# EAGLE board ptn2 (EAGLE 5.06)
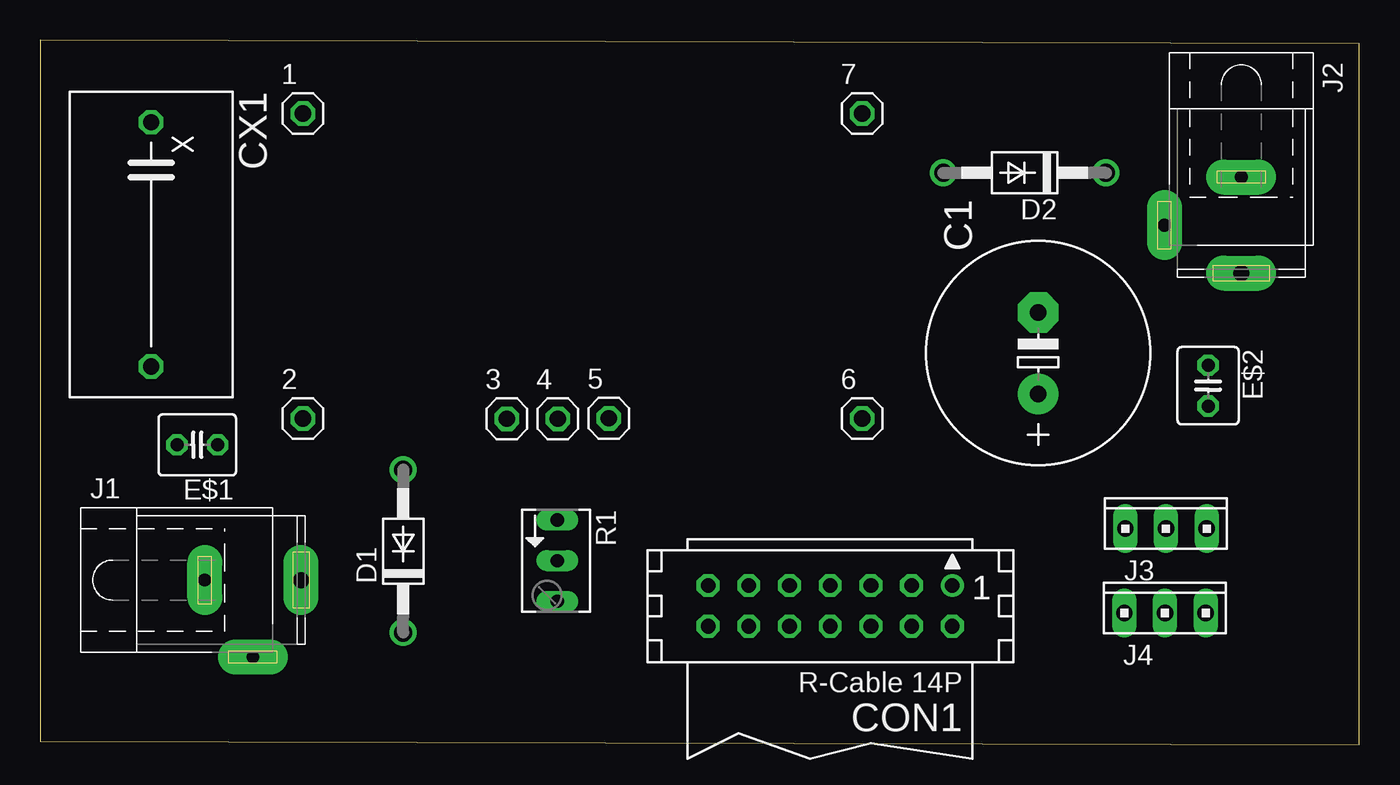
[diagram p0: board, top side]
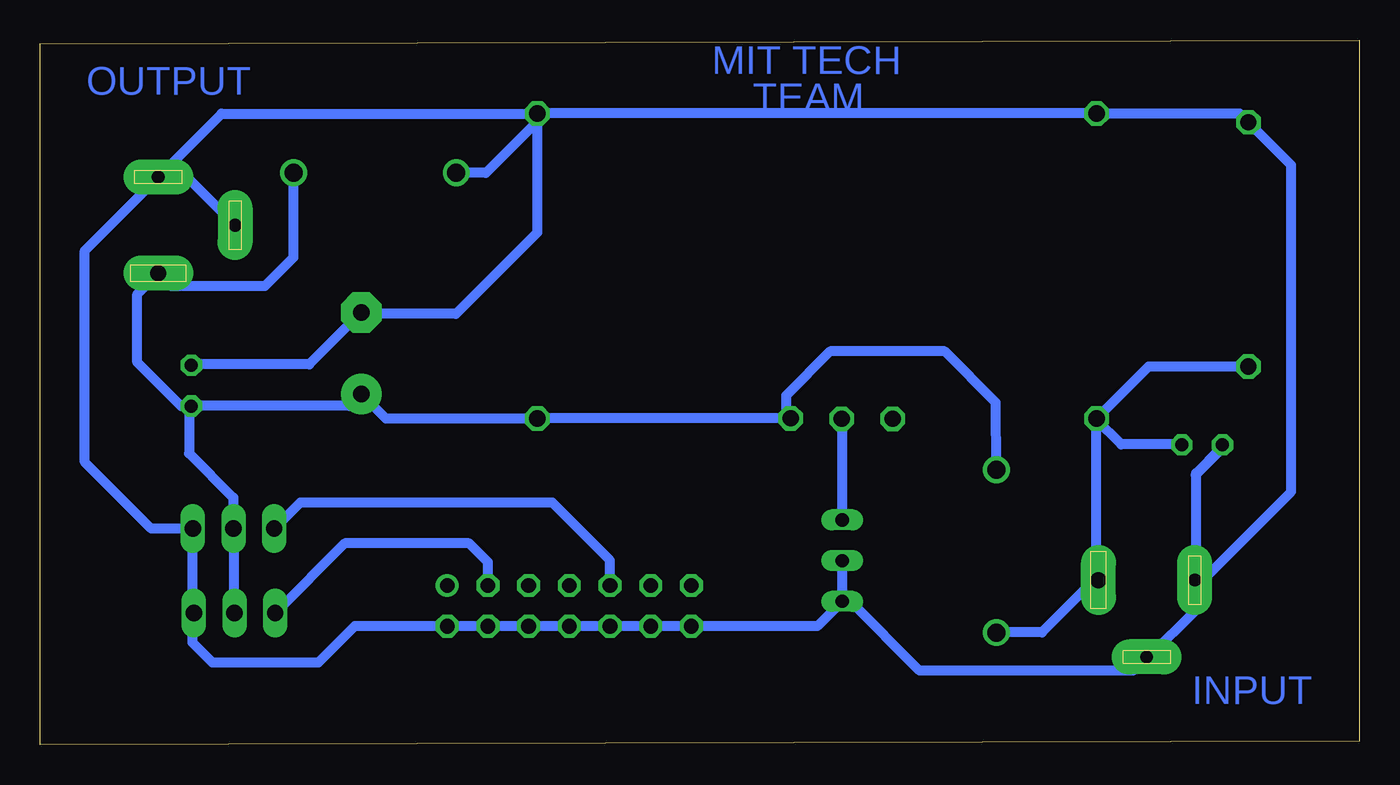
[diagram p1: board, bottom side, seen from below]

Size 82.34 x 43.97 mm. Coordinates in mm from the lower left corner, seen from the top.
Outline: 0,0.22 82.34,0 82.34,43.75 0,43.97 0,0.22
Copper layers (1*16): Top 0.035mm / dielectric 1.5mm / Bottom 0.035mm
Design rules "default": minimum track width 10mil, minimum drill 24mil, track to track 8mil, track to pad 8mil, pad to pad 8mil, via to via 8mil, smd to smd 8mil, copper to edge 40mil, drill to drill 8mil, minimum pad ring 10mil, minimum via ring 8mil, stop-mask expansion 4mil, vias tented up to drill 0mil, thermal gap 10mil

## Footprints (pad centres in the part's own frame; a part is rotated, then mirrored left to right if it is on the bottom)
1X01 = drill 1.016 octagon: 1 0,0
E5-13 = drill 1.016 pad 2.54 round: + -2.54,0 | drill 1.016 pad 2.54 octagon: - 2.54,0
CON14 = drill 0.914 round: 1 -7.62,-1.27 | drill 0.914 octagon: 2 -7.62,1.27; 3 -5.08,-1.27; 4 -5.08,1.27; 5 -2.54,-1.27; 6 -2.54,1.27; 7 0,-1.27; 8 0,1.27; 9 2.54,-1.27; 10 2.54,1.27; 11 5.08,-1.27; 12 5.08,1.27; 13 7.62,-1.27; 14 7.62,1.27
XC15B10 = drill 1.016 octagon: 1 -7.62,0; 2 7.62,0
DO41-10 = drill 1.118 round: A 5.08,0; C -5.08,0
C025-040X050 = drill 0.813 octagon: 1 -1.27,0; 2 1.27,0
SPC4078 = drill 0.8 pad 2.184 long: 1 -3,0; 2 0,-4.8 | drill 1 pad 2.184 long: 3 3,0
10X03MTA = drill 1.016 long: 1 2.54,0; 2 0,0; 3 -2.54,0
B64Y = drill 0.813 long: A 2.54,0; E -2.54,0; S 0,0

## Placement (x,y rotation side)
1  [1X01]  16.41,39.38 0 top
2  [1X01]  16.41,20.35 0 top
3  [1X01]  29.13,20.34 0 top
4  [1X01]  32.32,20.34 0 top
5  [1X01]  35.5,20.37 0 top
6  [1X01]  51.31,20.35 0 top
7  [1X01]  51.31,39.38 0 top
C1  [E5-13]  62.3,24.44 90 top
CON1  [CON14]  49.31,8.67 180 top
CX1  [XC15B10]  6.93,31.23 270 top
D1  1N4004  [DO41-10]  22.67,12.09 90 top
D2  1N4004  [DO41-10]  61.45,35.69 180 top
E$1  [C025-040X050]  9.81,18.71 180 top
E$2  [C025-040X050]  72.9,22.41 270 top
J1  [SPC4078]  13.28,10.28 0 top
J2  [SPC4078]  74.97,32.43 270 top
J3  [10X03MTA]  70.27,13.49 0 top
J4  [10X03MTA]  70.21,8.22 0 top
R1  [B64Y]  32.28,11.49 270 top

## Library data of the parts
1-7 = pinhead
C1 CX1 E$1 E$2 = rcl
CON1 = con-harting
D1 D2 = diode
J1 J2 = con-jack
J3 J4 = con-amp
R1 = pot

## Nets
N$1: 2.1 CX1.2 D1.C J1.3
N$2: CON1.3 J4.3
N$3: CON1.9 J3.3
N$5: 4.1 R1.E
N$7: 1.1 7.1 C1.- CON1.2 CON1.4 CON1.6 CON1.8 CON1.10 CON1.12 CON1.14 CX1.1 D2.A J1.1 J1.2 J2.1 J2.2 J3.1 J4.1 R1.A R1.S
N$8: 5.1 6.1 C1.+ D1.A D2.C J2.3 J3.2 J4.2

## Tracks (layer width: path | path; a pad name or v marks a point on that pad's centre or on a via)
N$1
  Bottom 0.61: CX1.2 13.16,23.6 2.1 16.41,10.41 | J1.3 16.41,10.41 | 16.41,10.41 16.42,10.41 19.81,7.02 22.65,7.02 D1.C
N$2
  Bottom 0.61: CON1.3 54.39,11.4 55.56,12.57 63.32,12.57 J4.3
N$3
  Bottom 0.61: CON1.9 46.77,11.52 50.37,15.11 66.11,15.11 J3.3
N$5
  Bottom 0.61: R1.E 32.28,20.3 4.1
N$7
  Bottom 0.61: 8.68,18.46 10.19,16.95 10.19,10.37 J1.1 | J1.1 9.77,10.28 4.26,15.79 4.26,36.17 CX1.1 7.47,39.38 1.1 | J1.1 10.19,10.19 10.19,8.43 13.15,5.48 J1.2 14.13,4.64 27.45,4.64 31.76,8.95 R1.A | 51.32,38.89 51.32,31.96 56.39,26.89 61.7,26.89 61.78,26.98 C1.- 65.54,23.74 72.98,23.74 | 51.32,38.89 7.1 71.01,39.38 74.6,35.79 | 74.6,35.79 J2.1 73.17,35.43 J2.2 | D2.A 54.52,35.69 51.32,38.89 | R1.A 33.83,7.4 CON1.14 CON1.12 CON1.10 CON1.8 CON1.6 CON1.4 CON1.2 62.71,7.4 64.99,5.13 71.58,5.13 72.83,6.38 72.83,8.14 J4.1 72.81,8.29 J3.1 75.41,13.49 79.56,17.64 79.56,30.84 74.6,35.79 | R1.A R1.S
N$8
  Bottom 0.61: 73.04,21.15 63.05,21.15 C1.+ 60.75,20.35 6.1 51.29,20.37 5.1 35.78,20.65 35.78,21.79 33.03,24.54 25.88,24.54 22.69,21.35 D1.A | 73.04,21.15 73.04,18.18 70.29,15.43 70.29,13.51 J3.2 70.27,8.29 J4.2 | 73.04,21.15 73.56,21.15 76.28,23.87 76.28,28.12 J2.3 74.17,28.63 68.31,28.63 66.53,30.41 D2.C
S$9
  Bottom 0.61: 8.39,18.67 10.24,16.82
S$13
  Bottom 0.61: 11.14,18.74 14.87,18.74 16.45,20.32
S$17
  Bottom 0.61: 16.36,39.39 51.36,39.39 51.36,39.31

## Text on the board
Bottom: OUTPUT | MIT TECH | TEAM | INPUT